# Altium PCB Resonator filter design.PcbDoc
Units mm, origin at the board's own origin, x right, y up, seen from the top; angles counter-clockwise.
Board outline 68.58 x 53.34 mm, 2 copper layers (Top Layer, Bottom Layer); 15 components, 32 nets, 174 pads, 357 vias.
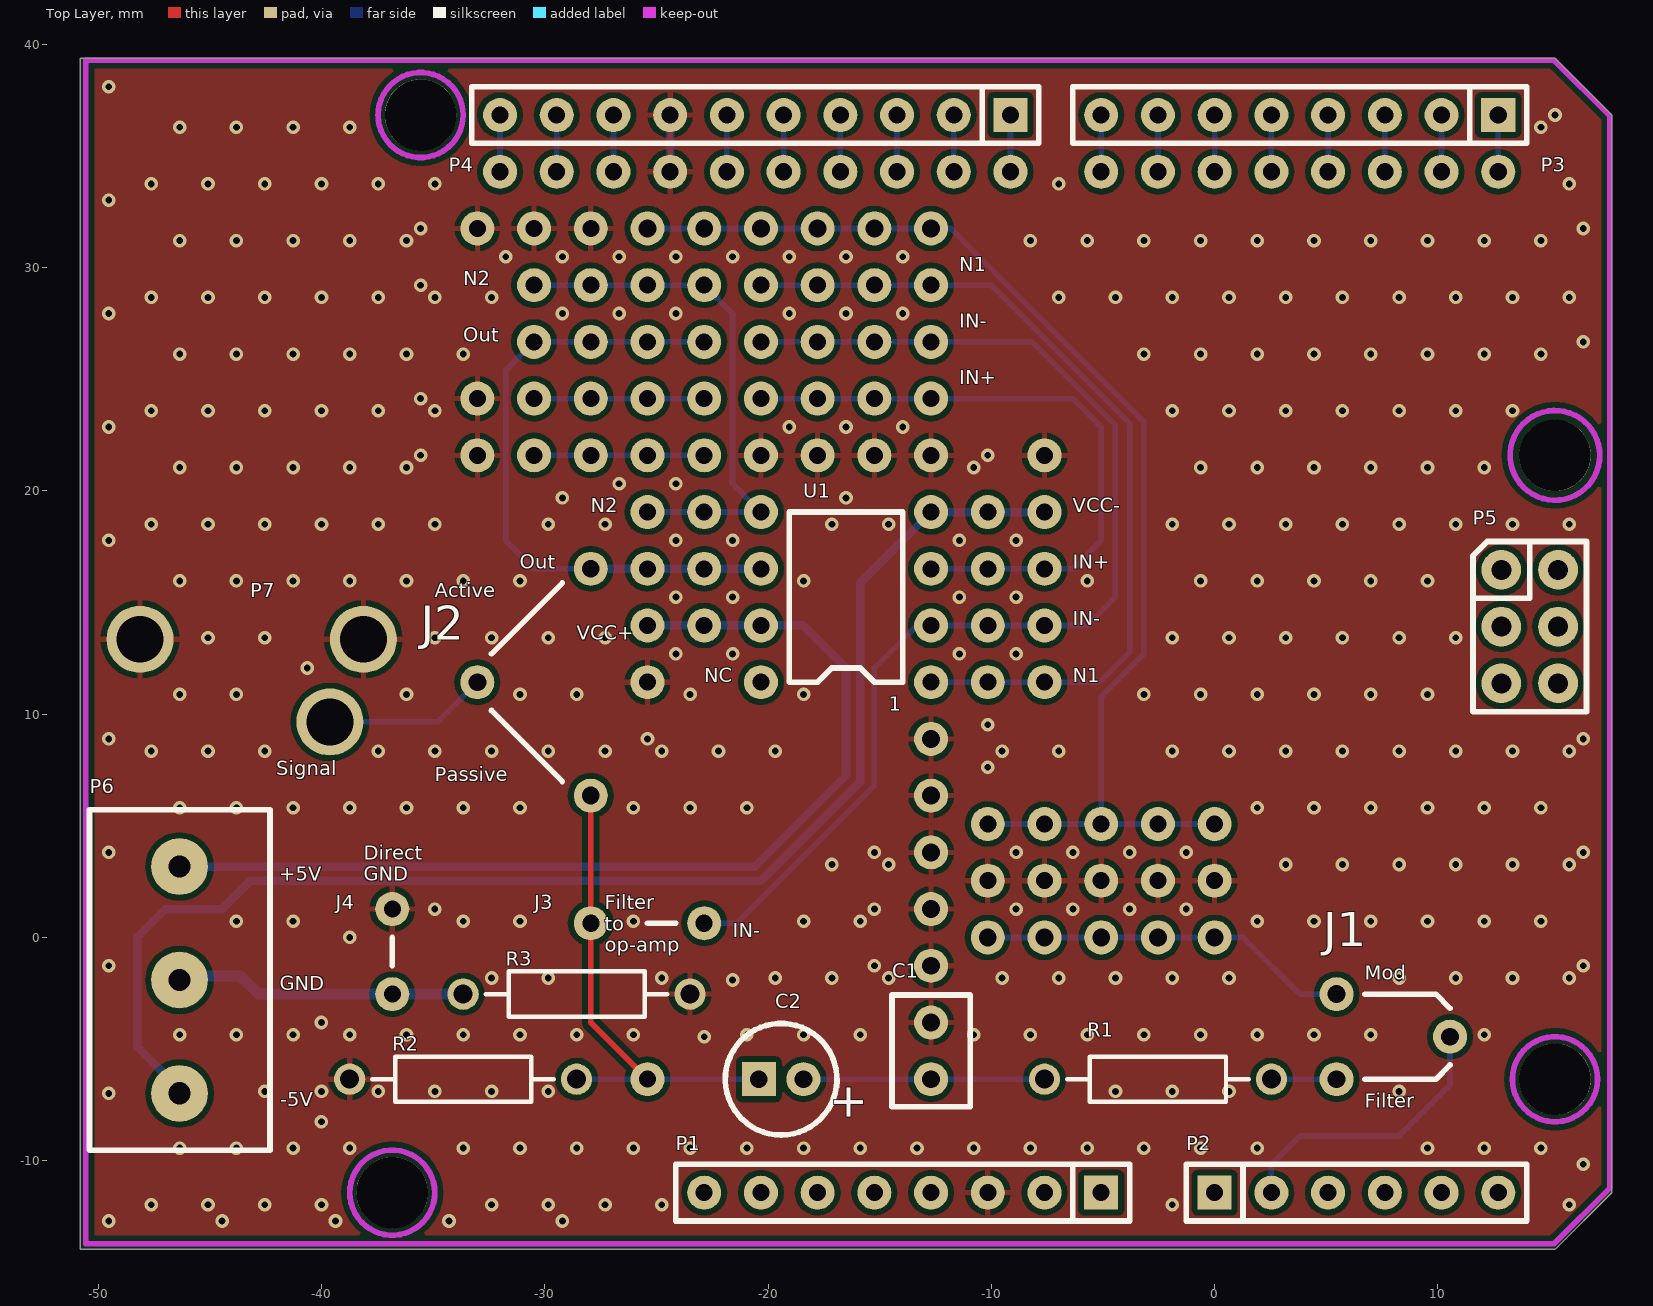
[diagram p0: Top Layer view]
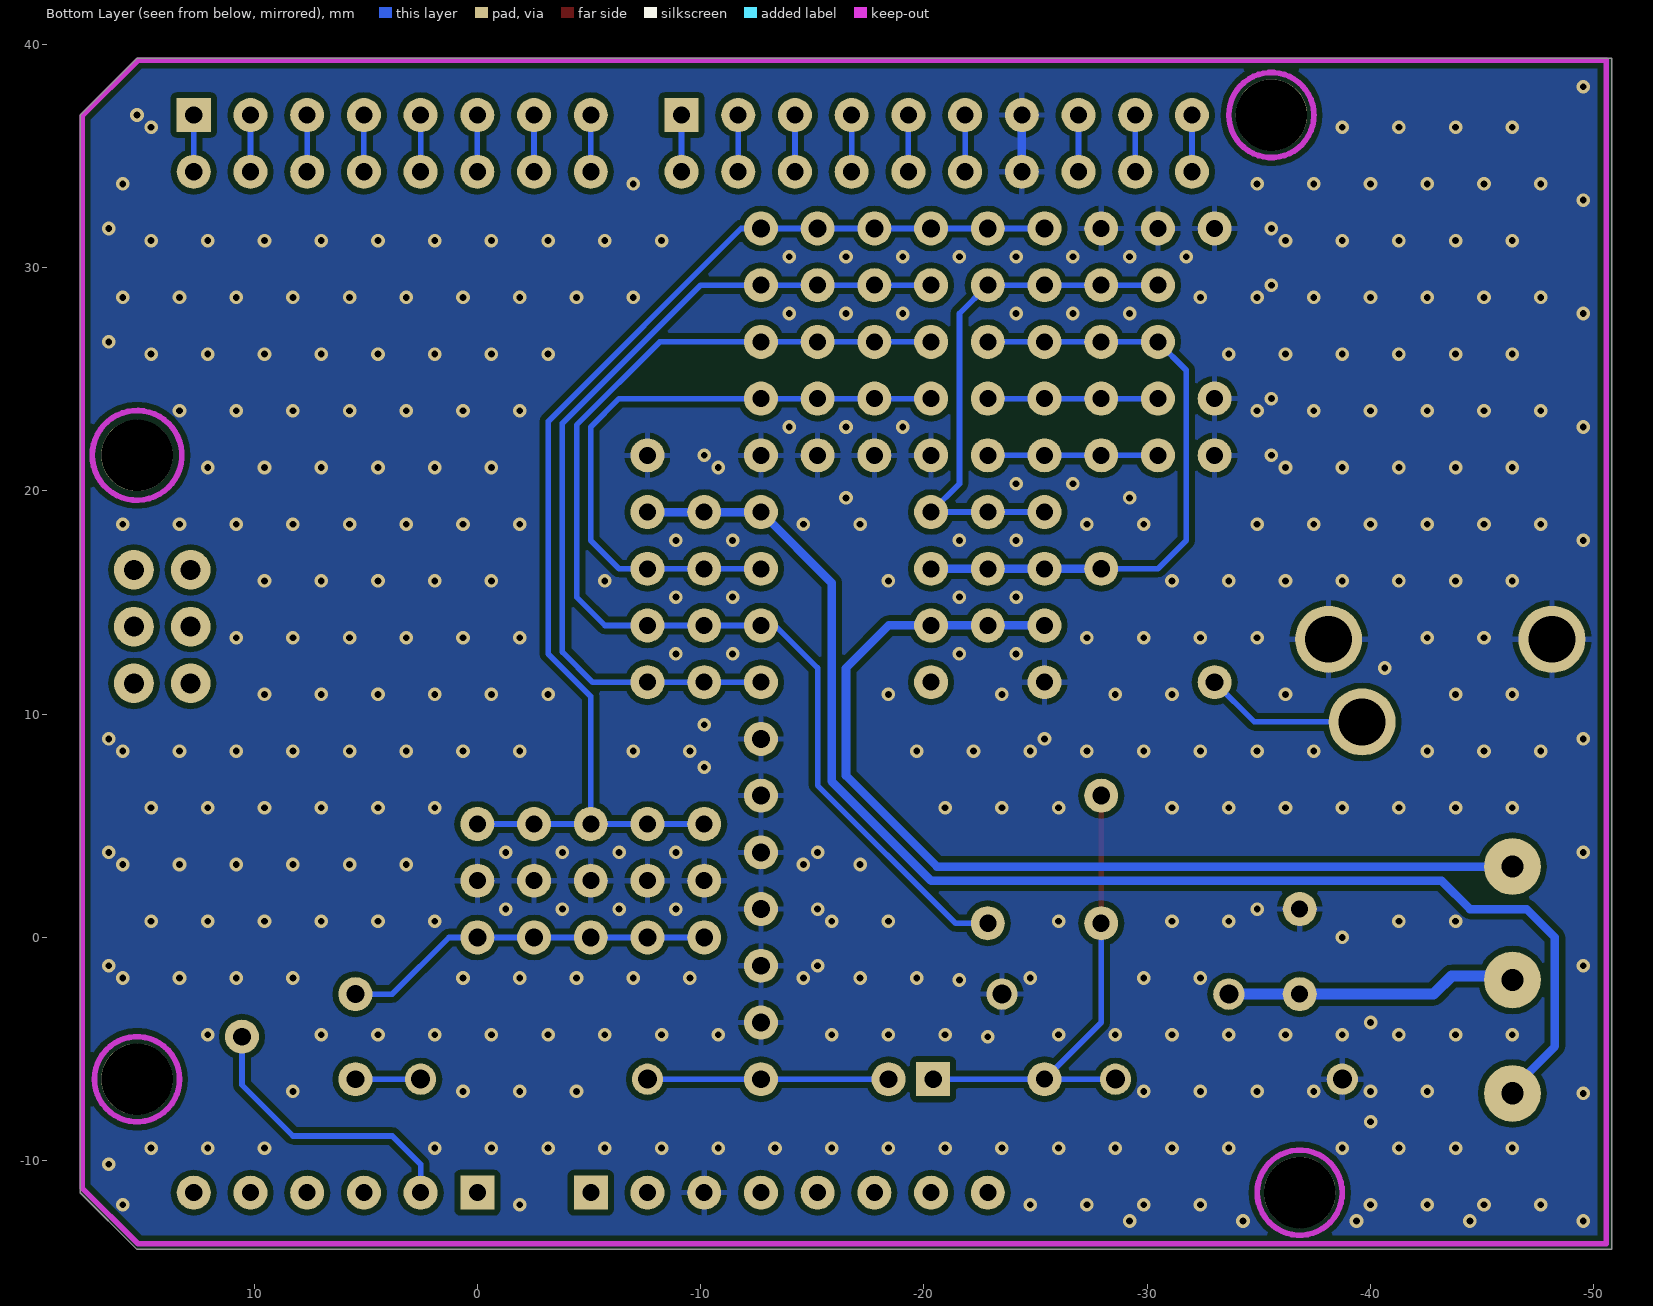
[diagram p1: Bottom Layer view, seen from below]

## Layer stack, top to bottom
Top Solder: solder mask 0.0102, Solder Resist, Dk 3.5
Top Layer: signal copper 0.0356
Dielectric 1: dielectric 0.32, FR-4, Dk 4.8
Bottom Layer: signal copper 0.0356
Bottom Solder: solder mask 0.0102, Solder Resist, Dk 3.5

## Board outline
-50.8,-13.97 -50.8,39.37 15.24,39.37 17.78,36.83 17.78,-11.43 15.24,-13.97

## Design rules (kind name [scope] priority, off if disabled: settings)
Clearance Polygon_ANT [(InNamedPolygon('Top_Layer-GND')) or (InNamedPolygon('Bottom_Layer-GND')) vs InNet('RF')] p1: gap=0.127 ignorepadtopadclearanceinfootprint=FALSE except(0: Arc-Hole Track-Hole SMDPad-Hole THPad-Hole Via-Hole Fill-Hole Poly-Hole Region-Hole Text-Hole)
Clearance Polygon [(InNamedPolygon('Top_Layer-GND')) or (InNamedPolygon('Bottom_Layer-GND'))] p2: gap=0.254 ignorepadtopadclearanceinfootprint=FALSE except(0: Arc-Hole Track-Hole SMDPad-Hole THPad-Hole Via-Hole Fill-Hole Poly-Hole Region-Hole Text-Hole)
Clearance [All] p3: gap=0.152 ignorepadtopadclearanceinfootprint=FALSE except(0: Arc-Hole Track-Hole SMDPad-Hole THPad-Hole Via-Hole Fill-Hole Poly-Hole Region-Hole Text-Hole)
ComponentClearance [All] p1 off: gap=0.254 collisioncheckmode=3 verticalgap=0.254 showdistances=FALSE
FabricationTestPointUsage TestPointUsage [All] p1: valid=0 allowmultiple=FALSE
FabricationTestpoint Testpoint [All] p1: side=3 testpointundercomponent=TRUE minsize=1.016 maxsize=2.54 preferedsize=1.524 minholesize=0 maxholesize=1.016 preferedholesize=0.813 testpointgrid=0.025 allowsidetop=TRUE allowsidebottom=TRUE usegrid=TRUE gridtolerance=0
Height [All] p1 off: minheight=0 maxheight=25.4 prefheight=12.7
HoleSize [All] p1: absolutevalues=TRUE maxlimit=4.064 minlimit=0.305 maxpercent=80.000 minpercent=20.000
MinimumAnnularRing [All] p1 off: minimumring=0.152
PolygonConnect PolygonConnect_1 [isVia and innet(gnd)] p1: connectstyle=Direct reliefconductorwidth=0.254 reliefentries=4 polygonreliefangle="90 Angle" airgapwidth=0.254
PolygonConnect [All] p2: connectstyle=Relief reliefconductorwidth=0.254 reliefentries=4 polygonreliefangle="90 Angle" airgapwidth=0.254
RoutingVias [All] p1: holewidth=0.406 width=0.813 viastyle="Through Hole" minholewidth=0.254 minwidth=0.254 maxholewidth=0.711 maxwidth=1.27
SilkToSolderMaskClearance SilkscreenOverComponentPads [IsPad] p1: minsilkscreentomaskgap=0.254 clearancetoexposedcopper=TRUE
SolderMaskExpansion [All] p1: expansion=0.076
Width [All] p1: maxlimit=2.54 minlimit=0.15 preferedwidth=0.152
24 further rules are at their usual default settings.

## Components (designator, comment, footprint, x,y, rotation, side; value= is the part's Value field where it differs from the comment)
C1 "Cap" "Cap 100nF" -12.7,-6.35 r90 top value=100nF
C2 "Cap" "Cap 3.3uF" -18.415,-6.35 r180 top value=3.3uF
J1 "Jumper" Jumper 5.461,-6.35 r0 top
J2 "Jumper 2" Jumper2 -33.02,11.43 r0 top
P1 "8x1 8.5mm header" "Header 8x1 8.5mm" -5.08,-11.43 r180 top
P2 "6x1 8.5mm header" "Header 6x1 8.5mm" 0,-11.43 r0 top
P3 "8x1 8.5mm header" "Header 8x1 8.5mm" 12.7,36.83 r180 top
P4 "10x1 8.5mm header" "Header 10x1 8.5mm" -9.144,36.83 r180 top
P5 "P5" ICSP 12.84,16.46 r0 top
P6 "Power Supply 3x1 header" "Power Supply connector" -46.355,3.175 r270 top
P7 "Jack out" "Jack out" -48.124,13.352 r0 top
R1 "Filter R1" AXIAL-0.4 -2.54,-6.35 r180 top value=1K
R2 "Filter R2" AXIAL-0.4 -33.655,-6.35 r0 top value=10K
R3 "earth coupling" AXIAL-0.4 -28.575,-2.54 r0 top value=10K
U1 "Op_Amp UA741CP" "Op-Amp UA741CP" -12.7,19.05 r180 top

## Footprints (in the part's own frame and the unit in brackets; to place one, negate y for a bottom-side part, rotate by r counter-clockwise, add the part's x,y. Pads: shape width x height; smd on the part's side, far side on the other; paste and mask are expansions set on the pad)
AXIAL-0.4 [mm] "Axial Device, Thru-Hole; 2 Leads; 0.4 in Pin Spacing"
  round 1.4 hole 0.85: 1(-5.08,0) 2(5.08,0)
  silkscreen extent -4.06,-1.02 4.06,1.02
"Cap 3.3uF" [mil]
  round 60 hole 31.5: 1(0,0)
  rect 60x60 hole 31.5: 2(78.74,0)
  silkscreen extent -59,-98 138,98
"Cap 100nF" [mil]
  round 60 hole 31.5: 1(0,0) 2(100,0)
  silkscreen extent -48,-69 148,69
"Header 6x1 8.5mm" [mil] "Stackable 6 pin header"
  rect 60x60 hole 30: 1(0,0)
  round 60 hole 30: 2(100,0) 3(200,0) 4(300,0) 5(400,0) 6(500,0)
  silkscreen extent -50,-50 550,50, body extent -50,-50 550,50, height 335
"Header 8x1 8.5mm" [mil] "Stackable 8 pin header"
  rect 60x60 hole 30: 1(0,0)
  round 60 hole 30: 2(100,0) 3(200,0) 4(300,0) 5(400,0) 6(500,0) 7(600,0) 8(700,0)
  silkscreen extent -50,-50 750,50, body extent -50,-50 750,50, height 335
"Header 10x1 8.5mm" [mil] "Stackable 10 pin header"
  rect 60x60 hole 30: 1(0,0)
  round 60 hole 30: 2(100,0) 3(200,0) 4(300,0) 5(400,0) 6(500,0) 7(600,0) 8(700,0) 9(800,0) 10(900,0)
  silkscreen extent -50,-50 950,50, body extent -50,-50 950,50, height 335
ICSP [mil]
  round 70 hole 35.43: 1(0,0) 2(100,0) 3(0,-100) 4(100,-100) 5(0,-200) 6(100,-200)
  silkscreen extent -50,-250 150,50, body extent -50,-250 150,50, height 485
"Jack out" [mm]
  round 3 hole 2.1: 1(8.5,-3.7) 2(0,0) 2(10,0)
Jumper [mil]
  round 60 hole 31.5: 1(0,150) 2(0,0) 3(200,75)
  silkscreen extent 50,0 200,150
Jumper2 [mil]
  round 60 hole 31.5: 1(0,0) 2(200,200) 3(200,-200)
  silkscreen extent 25,-175 150,175
"Op-Amp UA741CP" [mil]
  round 60 hole 30: 1(0,300) 2(0,200) 3(0,100) 4(0,0) 5(300,0) 6(300,100) 7(300,200) 8(300,300)
"Power Supply connector" [mm]
  round 2.54 hole 1: 1(0,0) 2(5.08,0) 3(10.16,0)
  silkscreen extent -2.54,-4.03 12.7,4.05

## Part data
C1 C2: library part "Cap Pol2", "Polarized Capacitor (Axial)", LatestRevisionDate=17-Jul-2002, LatestRevisionNote="Re-released for DXP Platform.", PackageDescription="Polarized Capacitor; 2 Leads", PackageReference=POLAR0.8, Published=8-Jun-2000, Publisher="Altium Limited"
P1: library part "POWER P1", Supplier Part Number 1=2698925, Supplier 1=Arrow, Supplier 2=Digi-Key, Supplier 3=Arrow, Supplier Part Number 2=SAM1198-08-ND, Supplier Part Number 3=2698940
P2: library part P2, Supplier Part Number 1=52553843, Supplier 1=Arrow, Supplier 2=Arrow, Supplier 3=Digi-Key, Supplier 4=Newark, Supplier Part Number 2=2699089, Supplier Part Number 3=SAM1198-06-ND, Supplier Part Number 4=11P8269
P3: library part P3, Supplier Part Number 1=2698925, Supplier 1=Arrow, Supplier 2=Arrow, Supplier 3=Digi-Key, Supplier Part Number 2=2698940, Supplier Part Number 3=SAM1198-08-ND
P4: library part P4, Supplier Part Number 1=2698789, Supplier 1=Arrow, Supplier 2=Arrow, Supplier 3=Digi-Key, Supplier Part Number 2=2698803S4475693N1004, Supplier Part Number 3=SAM1198-10-ND
P5: Supplier Part Number 1=SAM1185-03-ND, Supplier 1=Digi-Key, Supplier 2=Arrow, Supplier 3=Arrow, Supplier Part Number 2=2699340, Supplier Part Number 3=46091550
P6: library part "Power Supply"
R1 R2 R3: library part Res2, "Resistor", LatestRevisionDate=17-Jul-2002, LatestRevisionNote="Re-released for DXP Platform.", PackageDescription="Axial Device, Thru-Hole; 2 Leads; 0.4 in Pin Spacing", PackageReference=AXIAL-0.4, Published=8-Jun-2000, Publisher="Altium Limited"

## Free pads (board coordinates)
  round 3.2 hole 3.2: 0(-36.83,-11.43) 0(-35.56,36.83) 0(15.24,-6.35) 0(15.24,21.59)
  round 1.524 hole 0.762: 315(-10.16,19.05) 316(-7.62,19.05) 317(-22.86,13.97) 318(-25.4,13.97) 324(-10.16,11.43) 325(-7.62,11.43) 326(-10.16,13.97) 327(-7.62,13.97) 332(-22.86,19.05) 333(-25.4,19.05) 337(-10.16,16.51) 338(-7.62,16.51) 342(-12.7,29.21) 343(-15.24,29.21) 344(-17.78,29.21) 345(-20.32,29.21) 352(-12.7,24.13) 353(-15.24,24.13) 354(-17.78,24.13) 355(-20.32,24.13) 371(-30.48,29.21) 372(-27.94,29.21) 373(-25.4,29.21) 374(-22.86,29.21) 375(-20.32,21.59) 376(-17.78,21.59) 377(-15.24,21.59) 378(-12.7,21.59) 381(-33.02,24.13) 382(-33.02,21.59) 399(-33.02,31.75) 424(-27.94,31.75) 425(-30.48,31.75) 434(-20.32,26.67) 435(-17.78,26.67) 436(-15.24,26.67) 437(-12.7,26.67) 438(-27.94,0.635) 439(-22.86,0.635) 456(0,2.54) 457(-2.54,2.54) 458(-5.08,2.54) 459(-7.62,2.54) 460(-10.16,2.54) 461(-25.4,11.43) 462(-7.62,21.59) 464(-25.4,-6.35) 477(-22.86,21.59) 478(-25.4,21.59) 479(-27.94,21.59) 480(-30.48,21.59) 481(-10.16,5.08) 482(-7.62,5.08) 483(-5.08,5.08) 484(-2.54,5.08) 485(0,5.08) 494(-36.83,-2.54) 495(-36.83,1.27) 496(-22.86,16.51) 497(-25.4,16.51) 499(-22.86,26.67) 500(-25.4,26.67) 501(-27.94,26.67) 502(-30.48,26.67) 503(-22.86,24.13) 504(-25.4,24.13) 505(-27.94,24.13) 506(-30.48,24.13) 507(-32.004,34.29) 508(-29.464,34.29) 509(-26.924,34.29) 510(-24.384,34.29) 511(-21.844,34.29) 512(-19.304,34.29) 513(-16.764,34.29) 514(-14.224,34.29) 515(-11.684,34.29) 516(-9.144,34.29) 517(-5.08,34.29) 518(-2.54,34.29) 519(0,34.29) 520(2.54,34.29) 521(5.08,34.29) 522(7.62,34.29) 523(10.16,34.29) 524(12.7,34.29)
  round 1.524 hole 0.8: 463(-12.7,6.35) 492(-12.7,3.81) 493(-12.7,1.27) 525(-12.7,-1.27) 526(-12.7,8.89) 529(-25.4,31.75) 530(-22.86,31.75) 531(-20.32,31.75) 532(-17.78,31.75) 533(-15.24,31.75) 534(-12.7,31.75) 535(-10.16,0) 536(-7.62,0) 537(-5.08,0) 538(-2.54,0) 539(0,0)

## Via types
v1: diameter 0.61, hole 0.305, Top Layer to Bottom Layer, tented both sides, 357 vias

## Nets (pads, with @x,y where several pads share a name; then routed paths per layer and width w, separated by ;. In a path a pad name is that pad's centre, name@x,y a point inside that pad or via, vN(x,y) a via of type N, cw(c..) or ccw(c..) an arc to the next point about the centre after c; other vN are vias at no path point)
+5V: P6.1 pad.317 pad.318 U1.7 | length 46.7
  Bottom Layer w0.381: P6.1 -20.583,3.175 -16.51,7.248 -16.51,12.065 -18.415,13.97 U1.7 pad.317 pad.318 ; P6.1@-46.33,3.353 P6.1@-45.872,3.81
-5V: P6.3 pad.315 pad.316 U1.4 | length 61.3
  Bottom Layer w0.381: P6.3@-46.33,-6.807 -48.26,-4.877 -48.26,0 -46.99,1.27 -44.45,1.27 -43.18,2.54 -20.32,2.54 -15.875,6.985 -15.875,15.875 U1.4 pad.315 pad.316
Active_out: J2.2 pad.496 pad.497 pad.499 pad.500 pad.501 pad.502 U1.6 | length 28.7
  Bottom Layer w0.254: J2.2@-28.194,16.51 -30.48,16.51 -31.75,17.78 -31.75,25.4 pad.502 pad.501 pad.500 pad.499
  Bottom Layer w0.381: J2.2 pad.497 pad.496 U1.6
GND: C1.2 P1.3 P4.7 P7.2 pad.375 pad.376 pad.377 pad.378 pad.381 pad.382 pad.399 pad.424 pad.425 pad.456 pad.457 pad.458 pad.459 pad.460 pad.461 pad.462 pad.463 pad.492 pad.493 pad.495 pad.510 pad.525 pad.526 R2.1 R3.2 | length 2.5
  Bottom Layer w0.381: pad.510 P4.7
  other v1: -49.53,-12.7 -44.45,-12.7 -39.37,-12.7 -34.29,-12.7 -29.21,-12.7 -47.62,-11.975 -45.08,-11.975 -42.54,-11.975 -40,-11.975 -32.38,-11.975 -29.84,-11.975 -27.3,-11.975 -24.76,-11.975 -1.9,-11.975 15.88,-11.975 16.51,-10.16 -46.35,-9.435 -43.81,-9.435 -41.27,-9.435 -38.73,-9.435 -33.65,-9.435 -31.11,-9.435 -28.57,-9.435 -26.03,-9.435 -23.49,-9.435 -20.95,-9.435 -18.41,-9.435 -15.87,-9.435 -13.33,-9.435 -10.79,-9.435 -8.25,-9.435 -5.71,-9.435 -3.17,-9.435 -0.63,-9.435 1.91,-9.435 9.53,-9.435 12.07,-9.435 14.61,-9.435 -40.005,-8.255 -49.53,-6.985 -42.54,-6.895 -40,-6.895 -37.46,-6.895 -34.92,-6.895 -32.38,-6.895 -29.84,-6.895 -4.44,-6.895 -1.9,-6.895 0.64,-6.895 8.26,-6.895 -22.86,-4.445 -46.35,-4.355 -43.81,-4.355 -41.27,-4.355 -38.73,-4.355 -36.19,-4.355 -33.65,-4.355 -31.11,-4.355 -28.57,-4.355 -26.03,-4.355 -20.95,-4.355 -18.41,-4.355 -15.87,-4.355 -10.79,-4.355 -8.25,-4.355 -5.71,-4.355 -3.17,-4.355 -0.63,-4.355 1.91,-4.355 4.45,-4.355 6.99,-4.355 12.07,-4.355 -40.005,-3.81 -21.59,-1.905 -32.38,-1.815 -29.84,-1.815 -24.76,-1.815 -19.68,-1.815 -17.14,-1.815 -14.6,-1.815 -9.52,-1.815 -6.98,-1.815 -4.44,-1.815 -1.9,-1.815 0.64,-1.815 8.26,-1.815 10.8,-1.815 13.34,-1.815 15.88,-1.815 -49.53,-1.27 -15.24,-1.27 16.51,-1.27 -38.735,0 -43.81,0.725 -41.27,0.725 -33.65,0.725 -31.11,0.725 -26.03,0.725 -18.41,0.725 -15.87,0.725 1.91,0.725 4.45,0.725 6.99,0.725 9.53,0.725 12.07,0.725 14.61,0.725 -34.925,1.27 -15.24,1.27 -8.89,1.27 -6.35,1.27 -3.81,1.27 -1.27,1.27 -17.14,3.265 -14.6,3.265 3.18,3.265 5.72,3.265 8.26,3.265 10.8,3.265 13.34,3.265 15.88,3.265 -49.53,3.81 -15.24,3.81 -8.89,3.81 -6.35,3.81 -3.81,3.81 -1.27,3.81 16.51,3.81 -46.35,5.805 -43.81,5.805 -41.27,5.805 -38.73,5.805 -36.19,5.805 -33.65,5.805 -31.11,5.805 -26.03,5.805 -23.49,5.805 -20.95,5.805 1.91,5.805 4.45,5.805 6.99,5.805 9.53,5.805 12.07,5.805 14.61,5.805 -10.16,7.62 -47.62,8.345 -45.08,8.345 -42.54,8.345 -37.46,8.345 -34.92,8.345 -32.38,8.345 -29.84,8.345 -27.3,8.345 -24.76,8.345 -22.22,8.345 -19.68,8.345 -9.52,8.345 -6.98,8.345 -1.9,8.345 0.64,8.345 3.18,8.345 5.72,8.345 8.26,8.345 10.8,8.345 13.34,8.345 15.88,8.345 -49.53,8.89 -25.4,8.89 16.51,8.89 -10.16,9.525 -46.35,10.885 -43.81,10.885 -36.19,10.885 -31.11,10.885 -28.57,10.885 -23.49,10.885 -18.41,10.885 -3.17,10.885 -0.63,10.885 1.91,10.885 4.45,10.885 6.99,10.885 9.53,10.885 -40.64,12.065 -24.13,12.7 -21.59,12.7 -11.43,12.7 -8.89,12.7 -45.08,13.425 -42.54,13.425 -34.92,13.425 -32.38,13.425 -29.84,13.425 -27.3,13.425 -1.9,13.425 0.64,13.425 3.18,13.425 5.72,13.425 8.26,13.425 10.8,13.425 -24.13,15.24 -21.59,15.24 -11.43,15.24 -8.89,15.24 -46.35,15.965 -43.81,15.965 -41.27,15.965 -38.73,15.965 -36.19,15.965 -33.65,15.965 -31.11,15.965 -18.41,15.965 -5.71,15.965 -0.63,15.965 1.91,15.965 4.45,15.965 6.99,15.965 9.53,15.965 -49.53,17.78 -24.13,17.78 -21.59,17.78 -11.43,17.78 -8.89,17.78 -47.62,18.505 -45.08,18.505 -42.54,18.505 -40,18.505 -37.46,18.505 -34.92,18.505 -29.84,18.505 -27.3,18.505 -17.14,18.505 -14.6,18.505 -1.9,18.505 0.64,18.505 3.18,18.505 5.72,18.505 8.26,18.505 10.8,18.505 13.34,18.505 15.88,18.505 -29.21,19.685 -16.51,19.685 -26.67,20.32 -24.13,20.32 -46.35,21.045 -43.81,21.045 -41.27,21.045 -38.73,21.045 -36.19,21.045 -10.79,21.045 -0.63,21.045 1.91,21.045 4.45,21.045 6.99,21.045 9.53,21.045 12.07,21.045 -35.56,21.59 -10.16,21.59 -49.53,22.86 -19.05,22.86 -16.51,22.86 -13.97,22.86 -47.62,23.585 -45.08,23.585 -42.54,23.585 -40,23.585 -37.46,23.585 -34.92,23.585 -1.9,23.585 0.64,23.585 3.18,23.585 5.72,23.585 8.26,23.585 10.8,23.585 13.34,23.585 -35.56,24.13 -46.35,26.125 -43.81,26.125 -41.27,26.125 -38.73,26.125 -36.19,26.125 -33.65,26.125 -3.17,26.125 -0.63,26.125 1.91,26.125 4.45,26.125 6.99,26.125 9.53,26.125 12.07,26.125 14.61,26.125 16.51,26.67 -49.53,27.94 -29.21,27.94 -26.67,27.94 -24.13,27.94 -19.05,27.94 -16.51,27.94 -13.97,27.94 -47.62,28.665 -45.08,28.665 -42.54,28.665 -40,28.665 -37.46,28.665 -34.92,28.665 -32.38,28.665 -6.98,28.665 -4.44,28.665 -1.9,28.665 0.64,28.665 3.18,28.665 5.72,28.665 8.26,28.665 10.8,28.665 13.34,28.665 15.88,28.665 -35.56,29.21 -31.75,30.48 -29.21,30.48 -26.67,30.48 -24.13,30.48 -21.59,30.48 -19.05,30.48 -16.51,30.48 -13.97,30.48 -46.35,31.205 -43.81,31.205 -41.27,31.205 -38.73,31.205 -36.19,31.205 -8.25,31.205 -5.71,31.205 -3.17,31.205 -0.63,31.205 1.91,31.205 4.45,31.205 6.99,31.205 9.53,31.205 12.07,31.205 14.61,31.205 -35.56,31.75 16.51,31.75 -49.53,33.02 -47.62,33.745 -45.08,33.745 -42.54,33.745 -40,33.745 -37.46,33.745 -34.92,33.745 -6.98,33.745 15.88,33.745 -46.35,36.285 -43.81,36.285 -41.27,36.285 -38.73,36.285 14.61,36.285 15.24,36.83 -49.53,38.1
IN+: pad.337 pad.338 pad.352 pad.353 pad.354 pad.355 U1.3 | length 29
  Bottom Layer w0.254: pad.355 pad.354 pad.353 pad.352 -6.35,24.13 -5.08,22.86 -5.08,17.78 -6.35,16.51 pad.338 pad.337 U1.3
IN-: pad.326 pad.327 pad.434 pad.435 pad.436 pad.437 pad.439 U1.2 | length 52.7
  Bottom Layer w0.254: pad.439 -21.417,0.635 -15.24,6.812 -15.24,12.065 -13.335,13.97 U1.2 pad.326 pad.327 -5.715,13.97 -4.445,15.24 -4.445,22.943 -8.172,26.67 pad.437 pad.436 pad.435 pad.434
Jack: J2.1 P7.1 | length 8.1
  Top Layer w0.254: P7.1 P7.1@-39.116,10.16
  Bottom Layer w0.254: P7.1 -34.798,9.652 J2.1
Mod: J1.1 pad.535 pad.536 pad.537 pad.538 pad.539 | length 16.7
  Bottom Layer w0.254: pad.535 pad.536 pad.537 pad.538 pad.539 1.27,0 3.81,-2.54 J1.1
N1: pad.324 pad.325 pad.342 pad.343 pad.344 pad.345 U1.1 | length 38.8
  Bottom Layer w0.254: pad.345 pad.344 pad.343 pad.342 -9.993,29.21 -3.81,23.027 -3.81,12.783 -5.163,11.43 pad.325 pad.324 U1.1
N2: pad.332 pad.333 pad.371 pad.372 pad.373 pad.374 U1.5 | length 23.9
  Bottom Layer w0.254: pad.371 pad.372 pad.373 pad.374 -21.59,27.94 -21.59,20.32 U1.5 pad.333
NetP6_2: P6.2 pad.494 R3.1 | length 13.1
  Bottom Layer w0.381: P6.2@-46.33,-1.727 P6.2@-46.279,-1.778
  Bottom Layer w0.5: P6.2@-46.33,-1.727 -43.637,-1.727 -42.824,-2.54 pad.494 R3.1
P0.02: P4.8 pad.509 | length 2.5
  Bottom Layer w0.254: pad.509 P4.8
P0.11: P3.1 pad.524 | length 2.5
  Bottom Layer w0.254: pad.524 P3.1
P0.12: P3.2 pad.523 | length 2.5
  Bottom Layer w0.254: pad.523 P3.2
P0.13: P3.3 pad.522 | length 2.5
  Bottom Layer w0.254: pad.522 P3.3
P0.14: P3.4 pad.521 | length 2.5
  Bottom Layer w0.254: pad.521 P3.4
P0.15: P3.5 pad.520 | length 2.5
  Bottom Layer w0.254: pad.520 P3.5
P0.16: P3.6 pad.519 | length 2.5
  Bottom Layer w0.254: pad.519 P3.6
P0.17: P3.7 pad.518 | length 2.5
  Bottom Layer w0.254: pad.518 P3.7
P0.18: P3.8 pad.517 | length 2.5
  Bottom Layer w0.254: pad.517 P3.8
P0.19: P4.1 pad.516 | length 2.5
  Bottom Layer w0.254: pad.516 P4.1
P0.20: P4.2 pad.515 | length 2.5
  Bottom Layer w0.254: pad.515 P4.2
P0.22: P4.3 pad.514 | length 2.5
  Bottom Layer w0.254: pad.514 P4.3
P0.23: P4.4 pad.513 | length 2.5
  Bottom Layer w0.254: pad.513 P4.4
P0.24: P4.5 pad.512 | length 2.5
  Bottom Layer w0.254: pad.512 P4.5
P0.25: P4.6 pad.511 | length 2.5
  Bottom Layer w0.254: pad.511 P4.6
P0.26: P4.9 pad.508 | length 2.5
  Bottom Layer w0.254: pad.508 P4.9
P0.27: P4.10 pad.507 | length 2.5
  Bottom Layer w0.254: pad.507 P4.10
"PWM a": J1.3 P2.2 | length 12.9
  Bottom Layer w0.254: P2.2 2.54,-10.16 3.81,-8.89 8.255,-8.89 10.541,-6.604 J1.3
"PWM ab": J1.2 R1.1 | length 2.9
  Bottom Layer w0.254: R1.1 J1.2
"PWM b": C1.1 C2.1 R1.2 | length 10.7
  Bottom Layer w0.254: C2.1@-18.32,-6.35 C1.1 R1.2
Signal_ut: C2.2 J2.3 pad.438 pad.464 R2.2 | length 30.1
  Top Layer w0.254: J2.3@-28.194,6.35 -27.94,6.096 pad.438 -27.94,-3.81 pad.464
  Bottom Layer w0.254: R2.2 pad.464 ; pad.438 -27.94,-3.81 pad.464 ; C2.2@-20.32,-6.35 C2.2 pad.464
pads on no net: P1.1 P1.2 P1.4 P1.5 P1.6 P1.7 P1.8 P2.1 P2.3 P2.4 P2.5 P2.6 P5.1 P5.2 P5.3 P5.4 P5.5 P5.6 U1.8
copper on no net: | length 70
  Bottom Layer w0.254: -30.48,21.59 -27.94,21.59 -25.4,21.59 -22.86,21.59 ; -30.48,24.13 -27.94,24.13 -25.4,24.13 -22.86,24.13 ; -25.4,31.75 -11.815,31.75 -3.175,23.11 -3.175,12.7 -5.08,10.795 -5.08,5.08 ; -10.16,5.08 -7.62,5.08 -5.08,5.08 ; 0,5.08 -2.54,5.08 -5.08,5.08

## Polygon pours and split planes (outlines as drawn)
GND on Top Layer "Top_Layer-GND" (solid, remove dead copper, pour order 22): -50.55,-13.72 -50.55,39.28 15.2,39.28 17.7,36.78 17.7,-11.22 15.2,-13.72
GND on Bottom Layer "Bottom_Layer-GND" (solid, remove dead copper, pour order 24): -50.55,-13.72 -50.55,39.28 15.2,39.28 17.7,36.78 17.7,-11.22 15.2,-13.72

## Keep-outs
Keep-Out Layer:
  circle w0.254: c15.24,21.59 r2.008
  circle w0.254: c15.24,-6.35 r1.905
  circle w0.254: c-36.83,-11.43 r1.905
  circle w0.254: c-35.56,36.83 r1.905
  lines w0.254: -50.55,-13.72 -50.55,39.28 15.2,39.28 17.7,36.78 17.7,-11.22 15.2,-13.72 -50.55,-13.72

## Silkscreen, mask and mechanical layers (free items; w line width, h text height)
Top Overlay:
  lines w0.254: -36.83,-1.27 -36.83,0 ; -25.4,0.635 -24.13,0.635 ; -19.05,11.43 -19.05,19.05 -18.415,19.05 -13.97,19.05 -13.97,11.43 -15.24,11.43 -15.875,12.065 -17.145,12.065 -17.78,11.43 -19.05,11.43
  text "N1" at -11.43,29.845 h0.63
  text "N2" at -33.655,29.21 h0.63
  text "IN-" at -11.43,27.305 h0.63
  text "Out" at -33.655,26.67 h0.63
  text "IN+" at -11.43,24.765 h0.63
  text "1" at -14.605,10.16 h0.63
  text "Direct  / GND" at -38.1,2.54 h0.63
  text "J4" at -39.37,1.27 h0.63
  text "J3" at -30.48,1.27 h0.63
  text "IN-" at -21.59,0 h0.63
  text "Filter / to / op-amp" at -27.305,-0.635 h0.63
Mechanical 1:
  the board outline again, w0.254

## Text inside footprints (layer, text, board x,y; h text height)
C2: Top Overlay "+" at -15.735,-8.25 h1.52 r90
J1: Top Overlay "Mod" at 6.731,-1.905 h0.63; Top Overlay "Filter" at 6.731,-7.62 h0.63
J2: Top Overlay "Active" at -34.925,15.24 h0.63; Top Overlay "Passive" at -34.925,6.985 h0.63
P6: Top Overlay "+5V" at -41.895,2.535 h0.63; Top Overlay "GND" at -41.875,-2.365 h0.63; Top Overlay "-5V" at -41.845,-7.565 h0.63
P7: Top Overlay "Signal" at -42.034,7.272 h0.63
U1: Top Overlay "N1" at -6.35,11.43 h0.63; Top Overlay "IN-" at -6.35,13.97 h0.63; Top Overlay "IN+" at -6.35,16.51 h0.63; Top Overlay "VCC-" at -6.35,19.05 h0.63; Top Overlay "N2" at -27.94,19.05 h0.63; Top Overlay "Out" at -31.115,16.51 h0.63; Top Overlay "VCC+" at -28.575,13.335 h0.63; Top Overlay "NC" at -22.86,11.43 h0.63